# Altium PCB CT310高端控制盒基板电路V1.0.PcbDoc (part 6 of 8)
Units mil, origin at the board's own origin, x right, y up, seen from the top; angles counter-clockwise.
Board outline 8162.61 x 6196.81 mil, 2 copper layers (Top Layer, Bottom Layer), stack 65.792 mil thick; 265 components, 178 nets, 926 pads, 298 vias.
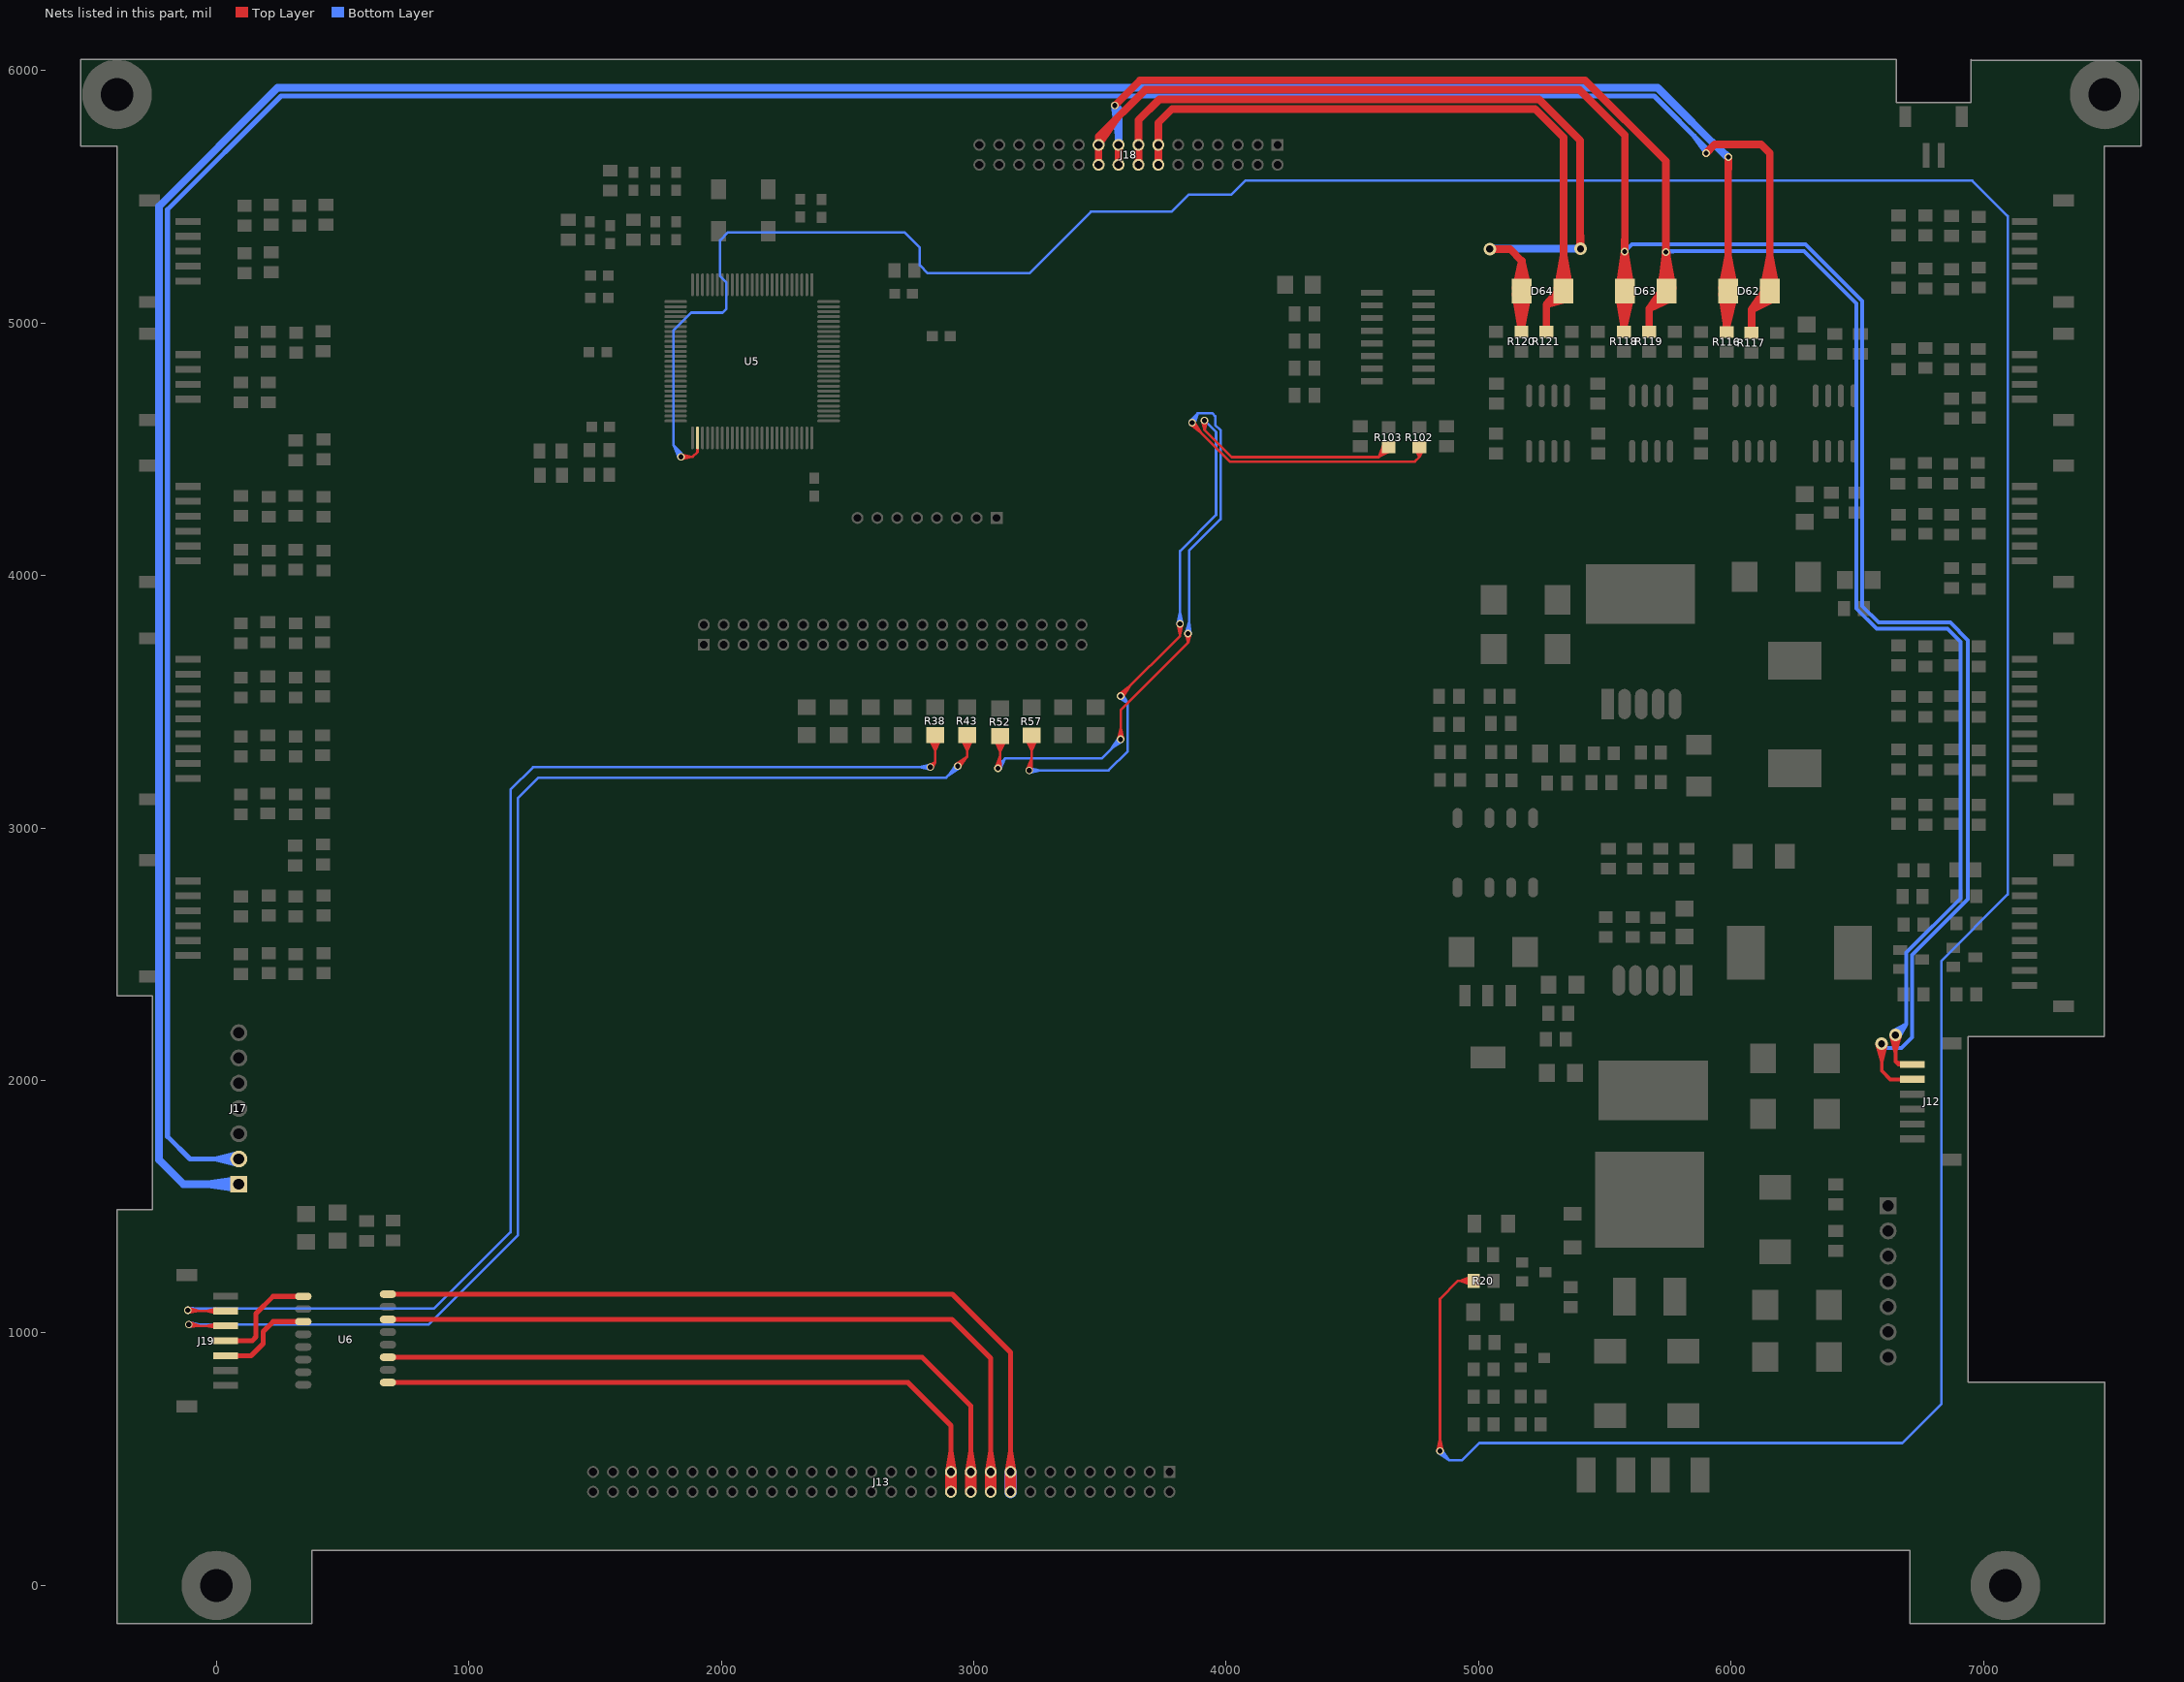
[diagram p6: the nets of this part, all layers, seen from the top]

## Via types
v1: diameter 30, hole 20, Top Layer to Bottom Layer, tented both sides, 226 vias
v2: diameter 60, hole 30, Top Layer to Bottom Layer, tented both sides, 32 vias
v3: diameter 50, hole 30, Top Layer to Bottom Layer, tented both sides, 20 vias
v4: diameter 80, hole 50, Top Layer to Bottom Layer, tented both sides, 10 vias
v5: diameter 50, hole 28, Top Layer to Bottom Layer, tented both sides, 8 vias
v6: diameter 24, hole 16, Top Layer to Bottom Layer, tented both sides, 1 vias
v7: diameter 30, hole 16, Top Layer to Bottom Layer, tented both sides, 1 vias

## Nets (pads, with @x,y where several pads share a name; then routed paths per layer and width w, separated by ;. In a path a pad name is that pad's centre, name@x,y a point inside that pad or via, vN(x,y) a via of type N, cw(c..) or ccw(c..) an arc to the next point about the centre after c; other vN are vias at no path point) (continued)
POWERCNT: R20.1 U5.52 | length 15018.3
  Top Layer w10: v1(1840,4470) 1887,4470 1905.76,4488.76 ; v1@1841.11,4460.06 1885,4470 v1@1841.11,4479.94 ; U5.52@1905.76,4505.9 1905.76,4488.76 ; U5.52@1905.76,4545.15 1905.76,4488.76 ; v1@4837.06,533.11 4847,577 v1@4856.94,533.11 ; v1(4847,532) 4847,1135 4918.3,1206.3 R20.1@4979.93,1206.3 ; R20.1@4976.69,1187.96 4926.3,1206.3 ; R20.1@4976.69,1224.63 4926.3,1206.3 ; R20.1@4979.23,1197.7 4926.3,1206.3 ; R20.1@4979.23,1214.89 4926.3,1206.3
  Bottom Layer w10: v1@1831.04,4465.56 1813.27,4512.73 ; v1@1847.91,4476.12 1813.27,4512.73 ; v1@4840.66,524.27 4883,496 ; v1(4847,532) 4883,496 ; v1@4854.73,538.34 4883,496 ; 1813.27,4512.73 v1(1840,4470) ; v1(1840,4470) 1840,4486 ; v1(1840,4470) 1840,4486 ; 1840,4486 1849.5,4473.12 1840,4486 ; 1840,4486 1830.5,4473.12 1840,4486 ; 1840,4486 1810,4516 1810,4970 1881,5041 2005,5041 2020,5056 2020,5160.54 1995,5185.54 1995,5327 2027,5359 2725.54,5359 2786,5298.54 2786,5229.35 2818.35,5197 3219.95,5197 3463.95,5441 3784,5441 3851,5508 4019.74,5508 4075.74,5564 6955,5564 7096,5423 7096,2736.34 6832.46,2472.8 6832.46,717.94 6678.52,564 5002.74,564 4934.74,496 4883,496
RJ45_RX+: J13.19 J13.20 U6.6 | length 3852.4
  Top Layer w20: U6.6@679.58,1053.5 2913.5,1053.5 3067,900 J13.19@3067,449.43 ; U6.6@697.1,1053.5 772.06,1053.5 ; J13.19@3053.43,448.25 J13.20@3067,370.69 ; J13.19@3053.42,450.53 3067,533.05 J13.19@3080.57,450.53 ; J13.19@3053.43,450.6 J13.20@3053.43,371.86 ; J13.19@3053.83,445.93 J13.20@3080.57,371.86 ; J13.19@3080.16,445.93 J13.20@3053.43,371.86 ; J13.19@3080.57,448.25 J13.20@3067,370.69 ; J13.19@3080.57,450.6 J13.20@3080.57,371.86 ; J13.20@3053.43,371.86 J13.19@3067,449.43 ; J13.20@3067,370.69 J13.19@3067,449.43 ; J13.19@3067,449.43 J13.20@3080.57,371.86
RJ45_RX-: J13.17 J13.18 U6.8 | length 4065
  Top Layer w20: U6.8@679.58,1153.5 2915.5,1153.5 3145.74,923.26 J13.17@3145.74,449.43 ; U6.8@697.1,1153.5 772.06,1153.5 ; J13.17@3132.17,448.25 J13.18@3145.74,370.69 ; J13.17@3132.16,450.53 3145.74,533.05 J13.17@3159.31,450.53 ; J13.17@3132.17,450.6 J13.18@3132.17,371.86 ; J13.17@3132.57,445.93 J13.18@3159.31,371.86 ; J13.17@3158.9,445.93 J13.18@3132.17,371.86 ; J13.17@3159.31,448.25 J13.18@3145.74,370.69 ; J13.17@3159.31,450.6 J13.18@3159.31,371.86 ; J13.18@3132.17,371.86 J13.17@3145.74,449.43 ; J13.18@3145.74,370.69 J13.17@3145.74,449.43 ; J13.17@3145.74,449.43 J13.18@3159.31,371.86
  Bottom Layer w50: J13.18@3145.74,370.69 J13.17@3145.74,449.43
RJ45_TX+: J13.23 J13.24 U6.1 | length 3435.3
  Top Layer w20: U6.1@679.58,803.5 2739.5,803.5 2909.52,633.48 J13.23@2909.52,449.43 ; U6.1@697.1,803.5 772.06,803.5 ; J13.24@2895.95,369.51 J13.23@2895.95,448.25 ; J13.24@2895.95,371.86 J13.23@2909.52,449.43 ; J13.23@2895.94,450.53 2909.52,533.05 J13.23@2923.09,450.53 ; J13.24@2896.35,374.18 J13.23@2923.09,448.25 ; J13.24@2922.68,374.18 J13.23@2895.95,448.25 ; J13.24@2923.09,369.51 J13.23@2923.09,448.25 ; J13.24@2923.09,371.86 J13.23@2909.52,449.43 ; J13.23@2895.95,448.25 J13.24@2909.52,370.69 ; J13.24@2909.52,370.69 J13.23@2923.09,448.25 ; J13.24@2909.52,370.69 J13.23@2909.52,449.43
RJ45_TX-: J13.21 J13.22 U6.3 | length 3600.7
  Top Layer w20: U6.3@679.58,903.5 2795.5,903.5 2988.26,710.74 J13.21@2988.26,449.43 ; U6.3@697.1,903.5 772.06,903.5 ; J13.21@2974.69,448.25 J13.22@2988.26,370.69 ; J13.21@2974.68,450.53 2988.26,533.05 J13.21@3001.83,450.53 ; J13.21@2974.69,450.6 J13.22@2974.69,371.86 ; J13.21@2975.09,445.93 J13.22@3001.83,371.86 ; J13.21@3001.42,445.93 J13.22@2974.69,371.86 ; J13.21@3001.83,448.25 J13.22@2988.26,370.69 ; J13.21@3001.83,450.6 J13.22@3001.83,371.86 ; J13.22@2974.69,371.86 J13.21@2988.26,449.43 ; J13.22@2988.26,370.69 J13.21@2988.26,449.43 ; J13.21@2988.26,449.43 J13.22@3001.83,371.86
RS232_RXD1: R57.2 R103.2 | length 4281.2
  Top Layer w10: R57.2@3203.13,3361.17 3229,3305.39 ; v1@3210.4,3230.78 3229,3277.02 ; R57.2@3212.65,3364.67 3229,3305.39 ; R57.2@3222.51,3366.54 3229,3305.39 ; R57.2@3229,3366.88 3229,3237 v1(3220,3228) 3229,3277.02 ; v1@3229.97,3227.19 3229,3277.02 ; R57.2@3235.49,3366.54 3229,3305.39 ; R57.2@3245.35,3364.67 3229,3305.39 ; R57.2@3254.87,3361.17 3229,3305.39 ; v1@3575.34,3530.46 3616.68,3560.68 ; v1@3580.5,3524.5 3817,3761 v1(3817,3809) ; v1(3582,3523) 3616.68,3560.68 ; v1@3589.98,3516.98 3616.68,3560.68 ; v1@3807.06,3807.89 3817,3764 v1@3826.94,3807.89 ; v1@3904.09,4612.65 3914,4577.05 ; v1@3923.91,4612.65 3914,4577.05 ; R103.2@4623.51,4517.71 4604.37,4469 ; R103.2@4632.49,4513.14 4604.37,4469 ; R103.2@4639.36,4507.93 4604.37,4469 ; R103.2@4643.29,4507.93 4604.37,4469 ; R103.2@4645.27,4501.65 4604.37,4469 ; R103.2@4650.77,4493.21 4604.37,4469 ; 3914,4577.05 v1(3914,4614) 3914,4577.05 ; 3914,4577.05 4022.05,4469 4604.37,4469
  Bottom Layer w10: v1(3220,3228) 3534,3228 3610,3304 3610,3495 ; v1@3221.11,3218.06 3265,3228 v1@3221.11,3237.94 ; v1@3575.88,3515.09 3610,3495 ; v1(3582,3523) 3610,3495 ; v1@3589.91,3529.12 3610,3495 ; v1@3807.06,3810.11 3817,3854 v1@3826.94,3810.11 ; v1(3817,3809) 3817,4097 3959.73,4239.73 3959.73,4568.27 v1(3914,4614)
RS232_RXD2: J19.5 R43.2 | length 6195.9
  Top Layer w10: v1@-108.99,1023 -63.07,1028.06 ; v1@-106.86,1042.77 -63.07,1028.06 ; J19.5@0.46,1019.32 -42.44,1028.06 ; J19.5@0.46,1036.79 -42.44,1028.06 ; J19.5@1.34,1028.06 -42.44,1028.06 ; J19.5@36.77,1028.06 -104.06,1028.06 v1(-109,1033) -63.07,1028.06 ; v1@2930.65,3252.73 2973.21,3281.21 v1@2944.73,3238.65 ; v1(2937,3245) 2973.69,3281.69 R43.2@2973.69,3367.88 ; R43.2@2947.81,3362.17 2973.69,3306.39 ; R43.2@2957.34,3365.67 2973.69,3306.39 ; R43.2@2967.2,3367.54 2973.69,3306.39 ; R43.2@2980.17,3367.54 2973.69,3306.39 ; R43.2@2990.03,3365.67 2973.69,3306.39 ; R43.2@2999.56,3362.17 2973.69,3306.39
  Bottom Layer w10: v1(-109,1033) 841,1033 1194,1386 1194,3117 1276,3199 2891,3199 v1(2937,3245) ; v1@-107.89,1023.06 -64,1033 v1@-107.89,1042.94 ; v1@2929.27,3251.35 2900.79,3208.79 v1@2943.35,3237.27
RS232_TXD1: R52.2 R102.2 | length 4802.3
  Top Layer w10: R52.2@3079.13,3358.17 3105,3302.39 ; v1@3086.4,3238.79 3105,3284.96 ; R52.2@3088.65,3361.67 3105,3302.39 ; R52.2@3098.51,3363.54 3105,3302.39 ; R52.2@3105,3363.88 3105,3245 v1(3096,3236) 3105,3284.96 ; v1@3105.97,3235.19 3105,3284.96 ; R52.2@3111.49,3363.54 3105,3302.39 ; R52.2@3121.35,3361.67 3105,3302.39 ; R52.2@3130.87,3358.17 3105,3302.39 ; v1@3572.06,3352.11 3582,3396 v1@3591.94,3352.11 ; v1(3582,3351) 3582,3467.35 3849,3734.35 ; v1@3839.1,3768.6 3849,3734.35 ; v1(3849,3770) 3849,3734.35 ; v1@3858.2,4597.67 3898.93,4566.67 ; v1@3858.9,3768.6 3849,3734.35 ; v1@3873.1,4610.86 3898.93,4566.67 ; 3874,4591.6 4014.6,4451 4747,4451 4765.29,4469.29 ; v1@3874,4604 3866,4604 v1(3865,4605) 3898.93,4566.67 ; R102.2@4747.22,4503.44 4765.29,4469.29 ; R102.2@4756.73,4506.96 4765.29,4469.29 ; R102.2@4765.29,4507.93 4765.29,4469.29 ; R102.2@4773.86,4506.96 4765.29,4469.29 ; R102.2@4783.37,4503.44 4765.29,4469.29
  Bottom Layer w10: v1@3088.53,3242.65 3124,3275 ; v1@3104.69,3231.05 3124,3275 ; v1@3574.27,3357.35 3545.79,3314.79 ; v1@3588.35,3343.27 3545.79,3314.79 ; v1@3839.2,3771.99 3853.2,3815.72 ; v1@3857.06,4611.07 3887,4642 ; v1@3859,3770.17 3853.2,3815.72 ; v1@3874.13,4600.92 3887,4642 ; 3124,3275 v1(3096,3236) 3096,3247 3124,3275 ; 3124,3275 3506,3275 v1(3582,3351) 3545.79,3314.79 ; 3853.2,3815.72 v1(3849,3770) 3853.2,3774.2 3853.2,4098.8 3977.73,4223.33 3977.73,4575.73 3957,4596.46 3957,4631 3946,4642 3887,4642 ; 3887,4642 v1(3865,4605) 3865,4620 3887,4642
RS232_TXD2: J19.6 R38.2 | length 6064.9
  Top Layer w10: v1@-112.53,1080.01 -67.72,1087.11 ; v1@-111.27,1099.85 -67.72,1087.11 ; J19.6@0.46,1078.38 -42.44,1087.11 ; J19.6@0.46,1095.85 -42.44,1087.11 ; J19.6@1.34,1087.11 -42.44,1087.11 ; J19.6@36.77,1087.11 -110.11,1087.11 v1(-113,1090) -67.72,1087.11 ; R38.2@2820.73,3362.17 2846.61,3306.39 ; v1@2822.4,3249.29 2846.61,3259.61 ; v1(2828,3241) 2846.61,3259.61 ; R38.2@2830.26,3365.67 2846.61,3306.39 ; v1@2836.29,3235.4 2846.61,3259.61 ; R38.2@2840.12,3367.54 2846.61,3306.39 ; R38.2@2846.61,3367.88 2846.61,3259.61 ; R38.2@2853.1,3367.54 2846.61,3306.39 ; R38.2@2862.96,3365.67 2846.61,3306.39 ; R38.2@2872.48,3362.17 2846.61,3306.39
  Bottom Layer w10: v1@-113.21,1100 -66.23,1096 ; v1@-110.68,1080.27 -66.23,1096 ; v1@2826.89,3231.06 2783,3241 v1@2826.89,3250.94 ; v1(2828,3241) 1254,3241 1165,3152 1165,1399 862,1096 -107,1096 v1(-113,1090) -66.23,1096
RS485_A2: D62.2 J17.2 R117.1 | length 12366.7
  Top Layer w30: v1(5901,5673) 5935,5707 6119,5707 6153.35,5672.65 D62.2@6153.35,5126.02 6081.01,5053.68 ; R117.1@6081.01,4961.38 6081.01,5053.68 ; D62.2@6129.09,5138.15 6153.35,5265.23 ; D62.2@6135.2,5132.43 6081.01,5053.68 ; D62.2@6153.35,5116.17 6081.01,5053.68 ; D62.2@6153.35,5135.86 6153.35,5265.23 ; D62.2@6166.81,5095.85 6081.01,5053.68 ; D62.2@6177.62,5138.15 6153.35,5265.23
  Bottom Layer w20: J17.2@86.05,1665.72 -4.46,1689 J17.2@86.05,1712.28 ; J17.2@89,1689 -105,1689 -194,1778 -194,5449 256,5899 5695,5899 5901,5693 ; 5851.47,5742.53 v1(5901,5673) ; v1(5901,5673) 5901,5693 ; v1(5901,5673) 5901,5693
RS485_A3: D63.2 J12.1 J18.17 J18.18 R119.1 | length 9471.3
  Top Layer w15: v5@6633.64,2177.81 6651,2110 v5@6668.36,2177.81 ; v5(6651,2180) 6651,2075 ; J12.1@6717.23,2063.64 6662.36,2063.64 ; 6651,2075 J12.1@6681.8,2063.64 ; 6651,2075 6662.36,2063.64 ; 6662.36,2063.64 J12.1@6681.8,2063.64 ; 6662.36,2063.64 J12.1@6681.8,2063.64
  Top Layer w30: v1(3559,5862) 3659,5962 5421,5962 5742,5641 v1(5742,5281) ; R119.1@5675.02,4965.39 5675.02,5056.18 ; D63.2@5720.59,5138.15 5744.85,5265.23 ; D63.2@5726.67,5132.39 5675.02,5056.18 ; D63.2@5727.08,5172.14 v1(5742,5281) ; D63.2@5744.85,5116.17 5675.02,5056.18 ; D63.2@5744.85,5135.86 5744.85,5265.23 ; 5744.85,5175.73 v1(5742,5281) ; 5744.85,5175.78 v1(5742,5281) ; D63.2@5758.15,5095.75 5675.02,5056.18 ; 5761.59,5177.57 v1(5742,5281) ; D63.2@5769.12,5138.15 5744.85,5265.23 ; 5675.02,5056.18 D63.2@5744.85,5126.02 5744.85,5278.15 v1(5742,5281) ; v1(5742,5281) 5744.85,5265.23 ; v1(5742,5281) 5744.85,5265.23 ; v1(5742,5281) 5744.85,5265.23 ; J18.18@3573.44,5626.93 J18.17@3573.44,5705.67 J18.18@3573.44,5626.93
  Bottom Layer w15: 5802.67,5285 v1(5742,5281) 5746,5285 6288.93,5285 6496.5,5077.43 6496.5,3868.97 6576.47,3789 6857,3789 6909,3737 6909,2720.87 6694.5,2506.37 6694.5,2223.5 ; v5@6640.51,2194.01 6694.5,2223.5 ; v5(6651,2180) 6694.5,2223.5 ; v5@6665.01,2169.51 6694.5,2223.5
  Bottom Layer w30: J18.18@3573.44,5626.93 J18.17@3573.44,5705.67 3573.44,5847.56 v1(3559,5862) 3573.44,5744.49
RS485_A4: D64.2 J18.13 J18.14 R121.1 | length 3357.2
  Top Layer w30: R121.1@5268.02,4965.39 5268.02,5073.02 ; D64.2@5312.09,5138.15 5336.35,5265.23 ; D64.2@5320.38,5134.58 5268.02,5073.02 ; D64.2@5336.35,5116.17 5268.02,5073.02 ; D64.2@5336.35,5135.86 5336.35,5265.23 ; D64.2@5346.11,5093.84 5268.02,5073.02 ; D64.2@5360.61,5138.15 5336.35,5265.23 ; J18.13@3730.92,5705.67 J18.14@3730.92,5626.93 J18.13@3730.92,5705.67 ; J18.13@3730.92,5705.67 3730.92,5792.92 3786,5848 5223.26,5848 5336.35,5734.91 D64.2@5336.35,5126.02 5321.02,5126.02 5268.02,5073.02
RS485_B2: D62.1 J17.1 R116.1 | length 12583.8
  Top Layer w30: D62.1@5963.66,5115.01 R116.1@5982.01,4986.6 ; D62.1@5963.74,5138.15 5988,5265.23 ; R116.1@5982.01,4964.38 D62.1@5982.01,5120.03 ; D62.1@5988,5116.17 R116.1@5982.01,4986.6 ; D62.1@5988,5126.02 5988,5656 v1(5989,5657) 5988,5551.97 ; D62.1@5988,5135.86 5988,5265.23 ; D62.1@6012.13,5112.77 R116.1@5982.01,4986.6 ; D62.1@6012.26,5138.15 5988,5265.23
  Bottom Layer w30: J17.1@87.62,1570.59 -34.46,1589 J17.1@87.62,1607.41 ; J17.1@89,1589 -131,1589 -227,1685 -227,5462.67 242.33,5932 5708.67,5932 v1@5986.33,5654.33 ; 5907.62,5733.04 v1(5989,5657)
RS485_B3: D63.1 J12.2 J18.19 J18.20 R118.1 | length 9742
  Top Layer w15: v5@6578.67,2142.57 6597,2074.99 ; v5@6579.76,2138.49 6597,2119 ; v5@6612.69,2139.75 6597,2119 ; v5@6613.39,2143.06 6597,2074.99 ; J12.2@6681.8,2004.58 6630.42,2004.58 ; J12.2@6717.23,2004.58 6630.42,2004.58 ; 6597,2074.99 v5(6596,2145) 6597,2119 ; 6597,2119 6597,2038 6630.42,2004.58
  Top Layer w30: J18.20@3494.7,5626.93 J18.19@3494.7,5705.67 ; 3568.16,5812.16 J18.19@3494.7,5705.67 ; D63.1@5555.17,5114.72 R118.1@5575.02,4986.69 ; D63.1@5555.24,5138.15 5579.5,5265.23 ; 5562.58,5176.6 v1(5578,5283) ; R118.1@5575.02,4965.39 5575.02,5121.53 D63.1@5579.5,5126.02 5579.5,5743.5 5399,5924 3680,5924 3494.7,5738.7 ; D63.1@5579.5,5116.17 R118.1@5575.02,4986.69 ; D63.1@5579.5,5135.86 5579.5,5265.23 ; 5579.5,5388.07 v1(5578,5283) ; 5595.93,5179.16 v1(5578,5283) ; D63.1@5603.67,5113.04 R118.1@5575.02,4986.69 ; D63.1@5603.76,5138.15 5579.5,5265.23 ; J18.19@3494.7,5705.67 3494.7,5738.7 ; J18.19@3494.7,5705.67 3494.7,5738.7 ; v1(5578,5283) 5579.5,5265.23 ; v1(5578,5283) 5579.5,5177.94 v1(5578,5283) ; v1(5578,5283) 5579.5,5265.23 ; v1(5578,5283) 5579.5,5265.23
  Bottom Layer w15: v1(5578,5283) 5606.5,5311.5 6294.96,5311.5 6519.5,5086.96 6519.5,3878.5 6584,3814 6868,3814 6938,3744 6938,2717.34 6717.5,2496.84 6717.5,2171.5 6675,2129 6612,2129 v5(6596,2145)
RS485_B4: D64.1 J18.15 J18.16 R120.1 | length 4808.2
  Top Layer w30: J18.16@3656,5623.11 J18.16@3652.18,5626.93 ; v5(5044,5293) 5124,5293 5171,5246 ; D64.1@5146.68,5114.63 R120.1@5167.02,4986.69 ; D64.1@5146.7,5114.26 R120.1@5169.12,4984.89 ; D64.1@5146.78,5138.55 5171,5246 ; D64.1@5152.34,5126.02 5167.02,5111.34 R120.1@5167.02,4958.39 ; D64.1@5167.02,5079.08 R120.1@5169.56,4965.39 ; D64.1@5171,5126.02 5171,5246 ; D64.1@5171,5135.86 5171,5246 ; D64.1@5195.18,5113.14 R120.1@5167.02,4986.69 ; D64.1@5195.23,5113.56 R120.1@5169.12,4984.89 ; D64.1@5195.22,5138.55 5171,5246 ; v5@5402,5285 5404,5287 v5(5404,5294) 5402,5409.07 ; v5@5402,5294 5402,5723 5239,5886 3735,5886 3652.18,5803.18 J18.15@3652.18,5705.67 ; J18.16@3652.18,5626.93 J18.15@3652.18,5705.67 ; J18.16@3652.18,5626.93 J18.15@3652.18,5705.67 ; R120.1@5167.02,4986.69 5171,5116.17 R120.1@5169.12,4984.89
  Bottom Layer w30: 5159.02,5294 v5(5044,5293) 5045,5294 v5(5404,5294)
RX+: J19.3 U6.11 | length 530.6
  Top Layer w20: J19.3@36.77,909.94 136.94,909.94 ; J19.3@72.2,909.94 136.94,909.94 ; 251.94,1044.5 U6.11@326.9,1044.5 ; U6.11@344.42,1044.5 224.5,1044.5 185,1005 185,958 136.94,909.94
RX-: J19.4 U6.9 | length 579.6
  Top Layer w20: J19.4@36.77,969 142,969 ; J19.4@72.2,969 142,969 ; 251.94,1144.5 U6.9@326.9,1144.5 ; U6.9@344.42,1144.5 224.5,1144.5 157,1077 157,984 142,969